# Altium PCB sensor_to_uart.PcbDoc
Units mm, origin at the board's own origin, x right, y up, seen from the top; angles counter-clockwise.
Board outline 46 x 32 mm, 2 copper layers (Top Layer, Bottom Layer); 25 components, 14 nets, 75 pads, 23 vias.
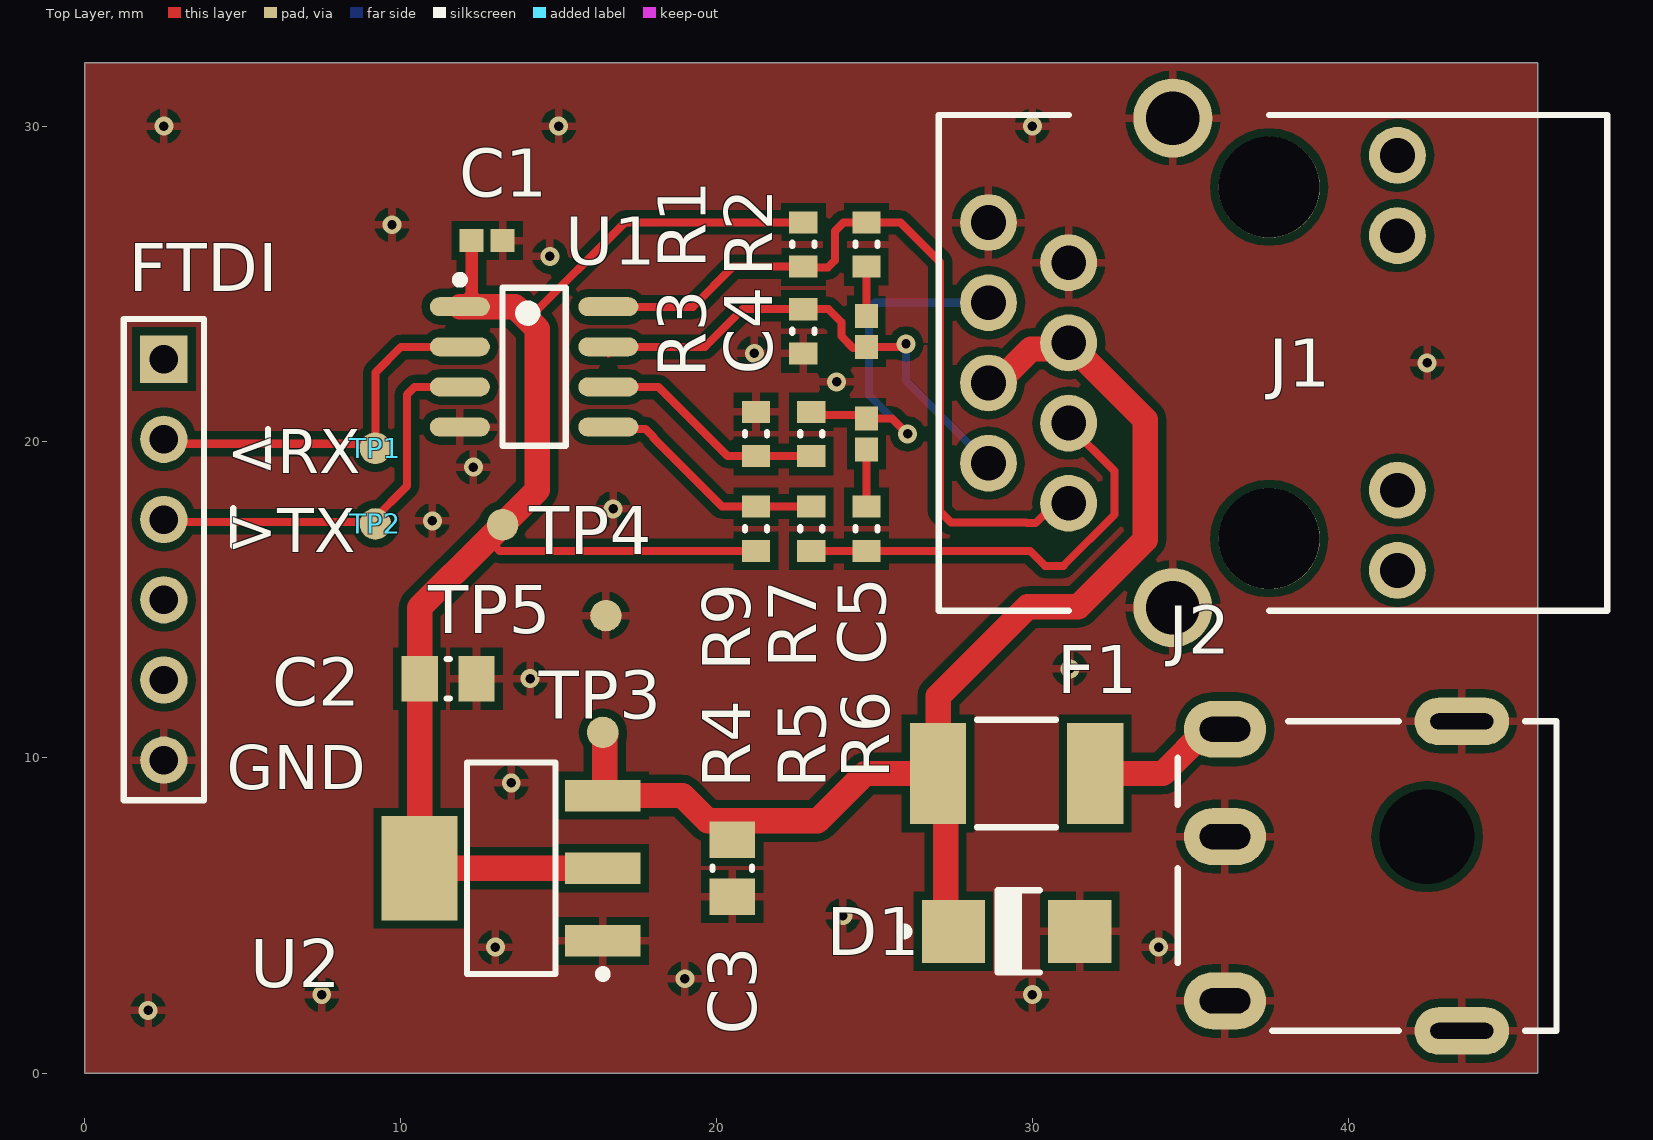
[diagram p0: Top Layer view]
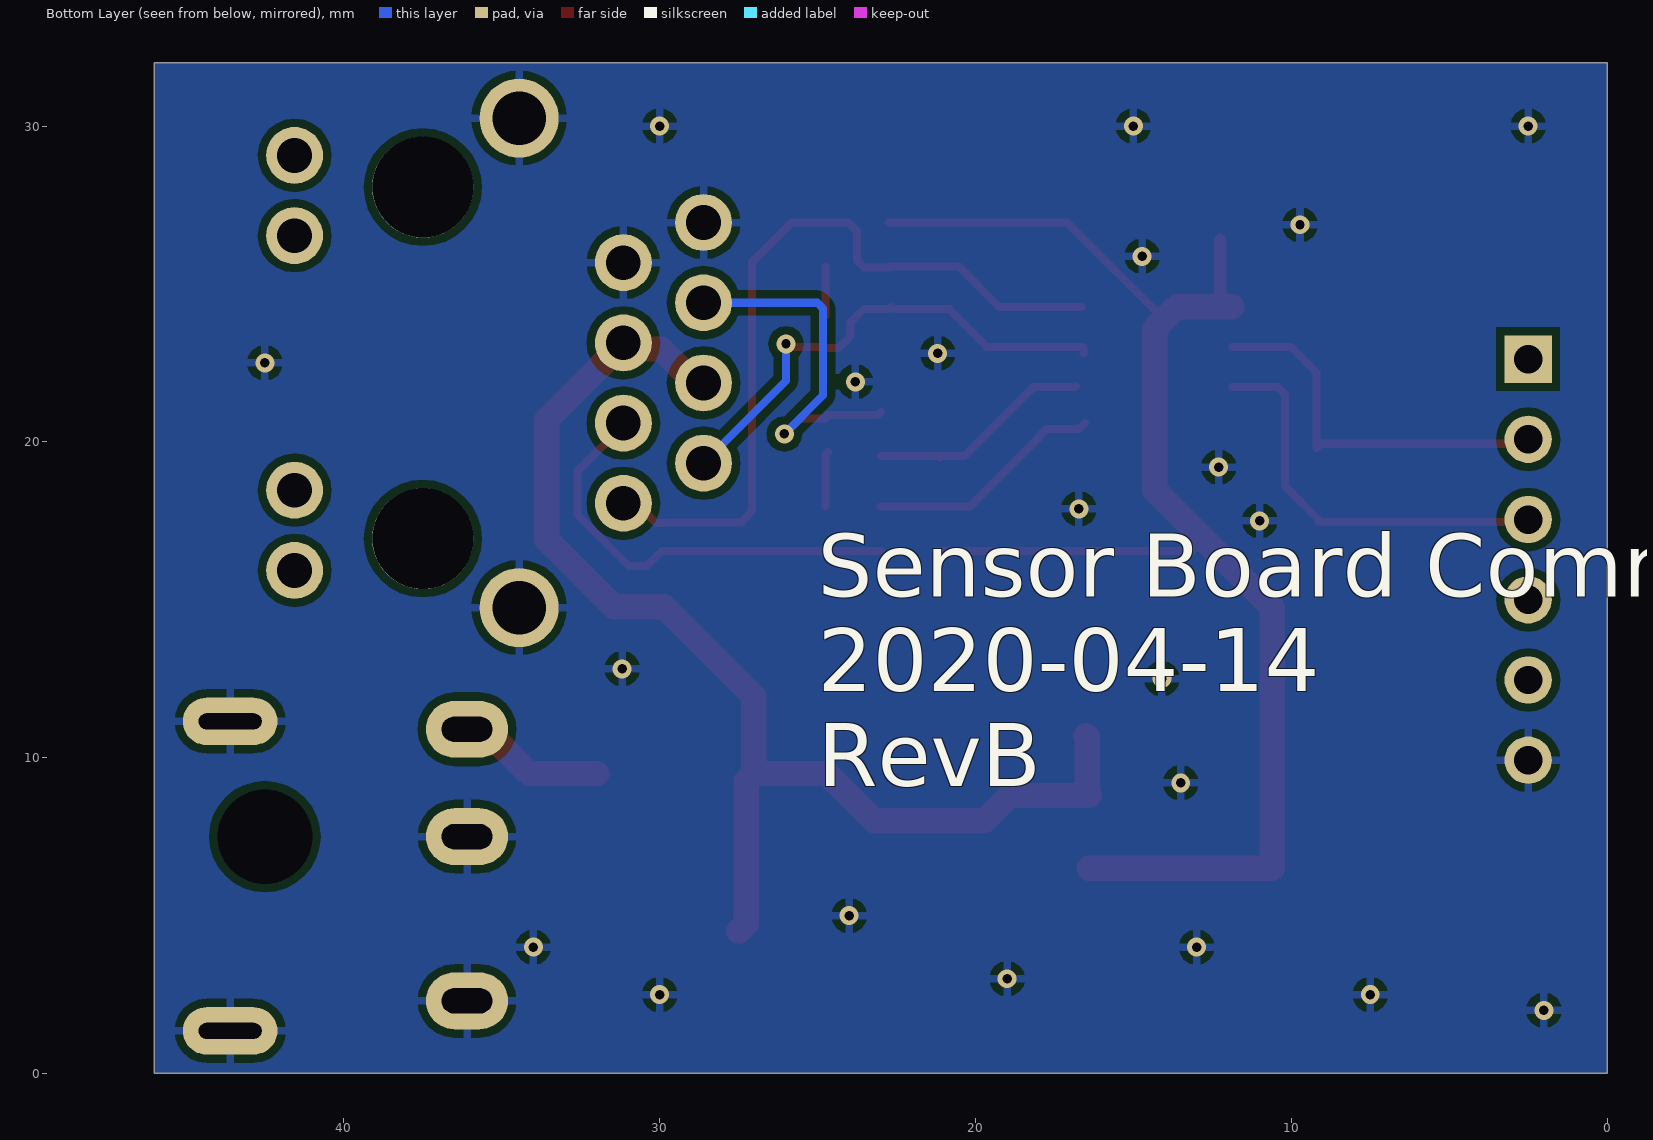
[diagram p1: Bottom Layer view, seen from below]

## Layer stack, top to bottom
Top Solder: solder mask 0.0102, Solder Resist, Dk 3.5
Top Layer: signal copper 0.0356
Dielectric 1: dielectric 0.32, FR-4, Dk 4.8
Bottom Layer: signal copper 0.0356
Bottom Solder: solder mask 0.0102, Solder Resist, Dk 3.5

## Board outline
0,0 0,32 46,32 46,0

## Design rules (kind name [scope] priority, off if disabled: settings)
Clearance [All] p1: gap=0.254 ignorepadtopadclearanceinfootprint=FALSE except(0: Arc-Hole Track-Hole SMDPad-Hole THPad-Hole Via-Hole Fill-Hole Poly-Hole Region-Hole Text-Hole)
PolygonConnect [All] p1: connectstyle=Relief reliefconductorwidth=0.254 reliefentries=4 polygonreliefangle="90 Angle" airgapwidth=0.254
RoomDefinition sensor_to_uart [InComponentClass('sensor_to_uart')] p1: confinementstyle=ConfineIn formatcopy=TRUE lockcomponents=FALSE outline 0,-2.5 50,-2.5 50,33.003 0,33.003
RoutingVias [All] p1: holewidth=0.711 width=1.27 viastyle="Through Hole" minholewidth=0.711 minwidth=1.27 maxholewidth=0.711 maxwidth=1.27
SolderMaskExpansion [All] p1: expansion=0.102 istentingtop=FALSE
Width [All] p1: maxlimit=0.8 minlimit=0.254 preferedwidth=0.254
30 further rules are at their usual default settings.

## Components (designator, comment, footprint, x,y, rotation, side; value= is the part's Value field where it differs from the comment)
C1 "GRM155R71C104KA88D" CAPC1005X55X25ML05T10 12.735,26.375 r180 top
C2 "CAP 10uF 10V 0805(2012)" CAPC0805(2012)145_N 11.5,12.5 r180 top value=10uF
C3 "CAP 10uF 10V 0805(2012)" CAPC0805(2012)145_N 20.5,6.5 r90 top value=10uF
C4 "TBD" CAPC1005X55X25ML05T10 24.75,23.5 r90 top
C5 "TBD" CAPC1005X55X25ML05T10 24.75,20.25 r270 top
D1 "MURA110T3G" ONSC-SMA-2-403D-02_V 29.5,4.5 r0 top
F1 "mSMD110-33V" SEAANDLAND_1812 29.5,9.5 r180 top
FTDI "Header 6" HDR1X6 2.5,22.62 r270 top
J1 "RJ45_59_8P8C_LED" RJ45_59_8P8C_LED 37.5,22.5 r90 top
J2 "DC-044A-2.5A-2.0" DC-044A-2.5A-2.0 46.6,7.5 r270 top
R1 "10k" RESC0603(1608)_L 22.75,26.25 r270 top value="120.00 Ohm"
R2 "100R" RESC0603(1608)_L 24.75,26.25 r270 top value="120.00 Ohm"
R3 "10k" RESC0603(1608)_L 22.75,23.5 r270 top value="120.00 Ohm"
R4 "10k" RESC0603(1608)_L 21.25,17.25 r90 top value="120.00 Ohm"
R5 "50R" RESC0603(1608)_L 23,17.25 r90 top value="120.00 Ohm"
R6 "100R" RESC0603(1608)_L 24.75,17.25 r90 top value="120.00 Ohm"
R7 "50R" RESC0603(1608)_L 23,20.25 r270 top value="120.00 Ohm"
R9 "10k" RESC0603(1608)_L 21.25,20.25 r90 top value="120.00 Ohm"
TP1 "TEST_POINT" TP-SMD-1mm 9.2,19.8 r270 top
TP2 "TEST_POINT" TP-SMD-1mm 9.2,17.4 r270 top
TP3 "TEST_POINT" TP-SMD-1mm 16.4,10.8 r270 top
TP4 "TEST_POINT" TP-SMD-1mm 13.225,17.375 r270 top
TP5 "TEST_POINT" TP-SMD-1mm 16.5,14.5 r270 top
U1 "ADM3488ARZ" ADI-R-8_L 14.225,22.375 r0 top
U2 "LD1117S33CTR" SOT-223_N 13.5,6.5 r180 top

## Footprints (in the part's own frame and the unit in brackets; to place one, negate y for a bottom-side part, rotate by r counter-clockwise, add the part's x,y. Pads: shape width x height; smd on the part's side, far side on the other; paste and mask are expansions set on the pad)
ADI-R-8_L [mm] "SOIC, 8-Leads, Body 5x4mm, Pitch 1.27mm, IPC High Density"
  oval 1.9x0.6 smd: 1(-2.35,1.905) 2(-2.35,0.635) 3(-2.35,-0.635) 4(-2.35,-1.905) 5(2.35,-1.905) 6(2.35,-0.635) 7(2.35,0.635) 8(2.35,1.905)
  silkscreen extent -2.47,-2.5 1,2.88, body extent -2,-2.5 2,2.5, height 1.75
CAPC0805(2012)145_N [mm] "Chip Capacitor, Body 2.0x1.2mm, Height 1.45mm, IPC Medium Density"
  rect 1.15x1.45 smd: 1(-0.9,0) 2(0.9,0)
  silkscreen extent -0.05,-0.62 0.05,0.63, body extent -1.1,-0.72 1.1,0.73, height 1.45
CAPC1005X55X25ML05T10 [mm] "Chip Capacitor, 2-Leads, Body 1.00x0.50mm, IPC Low Density"
  rect 0.76x0.72 smd: 1(-0.49,0) 2(0.49,0)
  body extent -0.53,-0.28 0.53,0.27, height 0.55
DC-044A-2.5A-2.0 [mm] "DC Jack, 6mm OD, 2mm ID"
  rrect100% 1.8x2.6 hole 0.8 slot 1.6 at 90 deg: 1(-3.4,-10.5) 2(5.2,-10.5) 3(0,-10.5)
  rrect100% 1.5x3 hole 0.5 slot 2 at 90 deg: 4(-3.65,-3) 5(6.15,-3)
  rrect100% 2x2 hole 3 unplated: MNT(0,-4.1)
  silkscreen extent -3.65,-12 6.15,0, body extent -3.75,-11.75 6.35,0, height 7.3
HDR1X6 [mm] "Connector; Header; 6 Position"
  rect 1.5x1.5 hole 0.9: 1(0,0)
  round 1.5 hole 0.9: 2(2.54,0) 3(5.08,0) 4(7.62,0) 5(10.16,0) 6(12.7,0)
  silkscreen extent -1.27,-1.27 13.97,1.27
ONSC-SMA-2-403D-02_V [mm] "Molded, 2-Leads, Body 4.57x2.92mm"
  rect 2x2 smd: 1(-2,0) 2(2,0)
  silkscreen extent -3.67,-1.3 0.74,1.3, body extent -2.16,-1.3 2.16,1.3, height 2.2
RESC0603(1608)_L [mm] "Chip Resistor, Body 1.6x0.8mm, IPC High Density"
  rect 0.7x0.9 smd: 1(-0.7,0) 2(0.7,0)
  silkscreen extent -0.05,-0.35 0.05,0.35, body extent -0.85,-0.47 0.85,0.47, height 0.6
RJ45_59_8P8C_LED [mm] "Generic RJ49 jack with LED and without magnetics"
  round 1.8 hole 1.1: 1(-4.445,6.35) 2(-3.175,8.89) 3(-1.905,6.35) 4(-0.635,8.89) 5(0.635,6.35) 6(1.905,8.89) 7(3.175,6.35) 8(4.445,8.89) 9(-6.57,-4.06) 10(-4.03,-4.06) 11(4.03,-4.06) 12(6.57,-4.06)
  round 3.2 hole 3.2 unplated: POS1(-5.565,0) POS2(5.565,0)
  round 2.5 hole 1.7: S1(-7.75,3.05) S2(7.75,3.05)
  silkscreen extent -7.85,-10.7 7.85,10.46, body extent -7.85,-10.58 7.85,10.58, height 13.45
SEAANDLAND_1812 [mm] "Surface Mount Fuses 1812"
  rrect0% 1.78x3.2 smd paste+0: 1(-2.49,0) 2(2.49,0)
  silkscreen extent -1.25,-1.71 1.25,1.71, body extent 0,-0.25 0.2,0, height 2
SOT-223_N [mm] "SOT223, 4-Leads, Body 6.5x3.5mm, Pitch 2.3mm, Lead Span 7mm, IPC Medium Density"
  rect 2.4x1 smd: 1(-2.9,2.3) 2(-2.9,0) 3(-2.9,-2.3)
  rect 2.4x3.3 smd: 4(2.9,0)
  silkscreen extent -3.03,-3.35 1.4,3.47, body extent -1.85,-3.35 1.85,3.35, height 1.8
TP-SMD-1mm [mm] "Test point, round, 1mm, SMD"
  round 1 smd paste-999: 1(0,0)

## Part data
C1 C4 C5: library part CMP-2100-03641-1, "Chip Capacitor, 0.1 uF, +/- 10%, 16 V, -55 to 125 degC, 0402 (1005 Metric), RoHS, Tape and Reel", Capacitance=100nF, Case Code (Imperial)=0402, Case Code (Metric)=1005, Dielectric=X7R, Dielectric Material=Ceramic, Insulation Resistance=10GR, Manufacturer=Murata, Max Operating Temperature=125degC, Min Operating Temperature=-55degC, Package Description="2-Pin Surface Mount Device, Body 1 x 0.5 mm", Package Quantity=1, Tolerance=10%, Voltage=16V, Case/Package=0402, Datasheet URL=http://psearch.en.murata.com/capacitor/product/GRM155R71C104KA88%23.pdf, Datasheet Version=42675.0, Depth=0.5mm, Height=0.5mm, Lead Free=LeadFree, Length=1mm, Manufacturer URL=http://www.murata.com/, Material=Ceramic, Mount=SurfaceMount, Number of Pins=2, Package Reference=0402, Packaging=TapeandReel, Radiation Hardening=No, REACH SVHC=NoSVHC, RoHSCompliant=true, Termination=SMD/SMT, Thickness=0.022inch, Voltage Rating=16V, Voltage Rating (DC)=16V, Width=0.5mm
C2 C3: library part CMP-1036-04922-1, "CAP 10uF 10V ±10% 0805 (2012 Metric) Thickness 1.45mm SMD", Case-EIA=0805, Case-Metric=2012, Rated Voltage="10 V", Tolerance=Â±10%, Max Thickness="1.45 mm", Technology=SMT
D1: library part CMP-0902-00293-1, "Surface Mount Ultrafast Power Rectifier, 2-Pin SMA, Pb-Free, Tape and Reel", Manufacturer="On Semiconductor", ComponentLink1Description="Manufacturer URL", ComponentLink1URL=http://www.onsemi.com/, ComponentLink2Description=Datasheet, ComponentLink2URL=http://www.onsemi.cn/pub_link/Collateral/MURA105T3-D.PDF, ComponentLink3Description="Package Specification", ComponentLink3URL=http://www.onsemi.com/pub_link/Collateral/403D-02.PDF, DatasheetVersion="Rev. 5", IFSM Max (A)=50, Mounting Technology="Surface Mount", PackageDescription="2-Pin Small Molded Package, J-Bend Lead, Body 2.605 x 4.315 mm", PackageReference=SMA-2-403D-02, PackageVersion="Rev. G, 07/2012", Packing="Tape and Reel", PartNumber=MURA110T3G, RoHS=TRUE, Type=Ultrafast
F1: "Surface Mount Fuses 33V 100A 1.1A 2.2A 1812 RoHS", Manufacturer="Sea & Land Electronic Corp", ComponentLink2Description=Datasheet, ComponentLink2URL="nSMD020-30V 0-2A-30V-Self-healing-fuse_C69680.pdf", PartNumber=mSMD110-33V
FTDI: "Header, 6-Pin", LatestRevisionDate=17-Jul-2002, LatestRevisionNote="Re-released for DXP Platform.", Publisher="Altium Limited"
J1: "Generic RJ49 jack with LED and without magnetics", Manufacturer=Unknown/Generic, PartNumber=RJ45_59_8P8C_LED
J2: "DC Jack, 6mm OD, 2mm ID", Manufacturer=XKB, PartNumber=DC-044A-2.5A-2.0
R1 R2 R3 R4 R5 R6 R7 R9: library part CMP-1012-00052-1, "120R 0.1W 5% 0603 (1608 Metric)  SMD", Case-EIA=0603, Case-Metric=1608, Power="0.1 W", Tolerance="5 %", Technology=SMT
TP1 TP2 TP3 TP4 TP5: "Test point"
U1: library part CMP-0535-00058-1, "3.3 V Slew Rate Limited, Full-Duplex, RS-485/RS-422 Transceivers, 3 to 3.6 V, -40 to 85 degC, 8-Pin SOIC (R-8), RoHS, Tube", Manufacturer="Analog Devices", Supply Voltage="3 to 3.6 V", Temperature Range="-40 to 85 degC", ComponentLink1Description="Manufacturer URL", ComponentLink1URL=http://www.analog.com/en/index.html, ComponentLink2Description=Datasheet, ComponentLink2URL=http://www.analog.com/static/imported-files/data_sheets/ADM3483_3485_3488_3490_3491.pdf, ComponentLink3Description="Package Specification", ComponentLink3URL=http://www.analog.com/media/en/package-pcb-resources/package/pkg_pdf/soic_narrow-r/r_8.pdf, DatasheetVersion="Rev. E", Duplex=Full, Guaranteed Data Rate="0.25 Mbps", Mounting Technology="Surface Mount", Number of Drivers=1, PackageDescription="8-Pin Standard Small Outline Package, Body 4.9 x 3.9 mm, Pitch 1.27 mm", PackageVersion=06/2006, Packing=Tube, PartNumber=ADM3488ARZ, Receiver Hysteresis="50 mV", RoHS=TRUE
U2: library part CMP-0244-00307-1, "Fixed Low Drop Positive Voltage Regulator, 3.3V, 4-Pin SOT-223, Tape and Reel", ComponentLink1Description="Manufacturer URL", ComponentLink1URL=http://www.st.com, ComponentLink2Description=Datasheet, ComponentLink2URL=http://www.st.com/internet/com/TECHNICAL_RESOURCES/TECHNICAL_LITERATURE/DATASHEET/CD00000544.pdf, DatasheetVersion=1/11/2011, PackageDescription="4-Pin SOT-223 Package, 6.5 x 3.5 mm Body, 2.3 mm Pitch, 7 mm Lead Span", PackageReference=SOT-223, PackageVersion=2010

## Via types
v1: diameter 0.6, hole 0.3, Top Layer to Bottom Layer, 23 vias

## Nets (pads, with @x,y where several pads share a name; then routed paths per layer and width w, separated by ;. In a path a pad name is that pad's centre, name@x,y a point inside that pad or via, vN(x,y) a via of type N, cw(c..) or ccw(c..) an arc to the next point about the centre after c; other vN are vias at no path point)
+3.3V: C1.2 C2.2 R1.1 R4.1 TP4.1 U1.1 U2.2 U2.4 | length 47.9
  Top Layer w0.254: 12.763,16.913 13.125,16.55 R4.1 ; 14.025,23.875 17.099,26.95 R1.1
  Top Layer w0.4: U1.1@12.245,24.38 C1.2
  Top Layer w0.8: U1.1 U1.1@12.145,24.28 ; U1.1@12.245,24.38 U1.1@12.145,24.28 ; U2.2 U2.4 C2.2 10.6,14.75 12.763,16.913 TP4.1 14.325,18.475 14.325,23.575 14.025,23.875 13.62,24.28 U1.1@12.145,24.28
+12V: C3.2 D1.1 F1.2 J1.4 J1.5 TP3.1 U2.3 | length 40.1
  Top Layer w0.8: TP3.1@16.5,10.7 16.462,10.662 16.462,8.862 U2.3 18.925,8.8 19.725,8 23.199,8 24.699,9.5 F1.2 ; D1.1 27.255,4.745 27.255,9.255 F1.2 ; J1.4 28.881,21.865 29.959,22.944 30.959,22.944 J1.5 33.575,20.71 33.575,16.9 31.45,14.775 29.85,14.775 27.025,11.95 27.025,9.515 F1.2
+12V_IN: F1.1 J2.1 | length 4.7
  Top Layer w0.8: F1.1 34.13,9.5 35.53,10.9 J2.1
GND: C1.1 C2.1 C3.1 D1.2 FTDI.6 J1.7 J1.8 J1.S1 J1.S2 J2.2 J2.3 J2.4 J2.5 R3.2 R9.2 TP5.1 U1.4 U2.1
  other v1: 2,2 7.5,2.5 30,2.5 19,3 13,4 34,4 24,5 13.5,9.2 14.1,12.5 31.187,12.813 11,17.5 16.725,17.875 12.3,19.2 23.8,21.9 42.5,22.5 21.2,22.8 14.725,25.875 9.725,26.875 2.5,30 15,30 30,30
NetC4_2: C4.2 R2.2 | length 1.6
  Top Layer w0.254: C4.2 R2.2
NetC5_2: C5.2 R6.2 | length 1.8
  Top Layer w0.254: C5.2@24.675,19.675 24.75,19.6 R6.2
NetR4_2: R4.2 R5.2 U1.5 | length 7.6
  Top Layer w0.254: U1.5@16.525,20.6 16.721,20.404 17.747,20.404 18,20.151 18,20.125 20.175,17.95 R4.2 R5.2
NetR7_2: R7.2 R9.1 U1.6 | length 7.2
  Top Layer w0.254: U1.6@16.825,21.775 16.86,21.74 18.16,21.74 20.35,19.55 R9.1 ; R9.1@21.125,19.5 21.175,19.55 R7.2
SENSOR_RX+: J1.3 R5.1 R6.1 | length 14.1
  Top Layer w0.254: R5.1 24.7,16.55 R6.1@24.75,16.5 ; R6.1@24.8,16.45 R6.1@24.75,16.5 ; J1.3 31.15,20.525 32.6,19.075 32.6,17.693 30.982,16.075 30.4,16.075 29.925,16.55 24.8,16.55 R6.1@24.75,16.5
SENSOR_RX-: C5.1 J1.6 R7.1 | length 11.7
  Top Layer w0.254: R7.1 23.105,20.845 24.68,20.845 C5.1@24.785,20.74 ; C5.1 C5.1@24.785,20.74 ; v1(26.05,20.25) 25.56,20.74 C5.1@24.785,20.74
  Bottom Layer w0.254: v1(26.05,20.25) 24.825,21.475 24.825,24.226 25.004,24.405 J1.6
SENSOR_TX+: J1.1 R1.2 R2.1 U1.8 | length 25
  Top Layer w0.254: U1.8@16.65,24.275 19.25,24.275 20.525,25.55 22.575,25.55 R1.2 ; R1.2@22.75,25.525 23.525,25.525 23.75,25.75 23.75,26.675 24.025,26.95 R2.1 25.825,26.95 27.075,25.7 27.075,17.8 27.425,17.45 29.8,17.45 29.825,17.425 30.102,17.425 30.732,18.055 J1.1
SENSOR_TX-: C4.1 J1.2 R3.1 U1.7 | length 15.8
  Top Layer w0.254: U1.7@16.575,22.791 U1.7 19.635,23.01 20.825,24.2 22.6,24.2 R3.1@22.675,24.275 ; R3.1 23.55,24.2 23.95,23.8 23.95,23.35 24.325,22.975 24.715,22.975 C4.1 25.91,23.01 v1(26,23.1)
  Bottom Layer w0.254: v1(26,23.1) 26,21.935 J1.2
USART1_RX: FTDI.2 TP1.1 U1.2 | length 12.2
  Top Layer w0.254: FTDI.2 2.64,19.94 9.06,19.94 TP1.1 9.2,22.2 10.01,23.01 U1.2
USART1_TX: FTDI.3 TP2.1 U1.3 | length 12.9
  Top Layer w0.254: FTDI.3 2.57,17.47 9.13,17.47 9.13,17.532 10.2,18.602 10.2,21.5 10.44,21.74 U1.3
pads on no net: FTDI.1 FTDI.4 FTDI.5 J1.9 J1.10 J1.11 J1.12 J1.POS1 J1.POS2 J2.MNT

## Polygon pours and split planes (outlines as drawn)
GND on Top Layer "GND_L01_P001" (solid, pour order 1): 0,0 46,0 46,32 0,32
GND on Bottom Layer "GND_L02_P000" (solid, pour order 0): 0,0 46,0 46,32 0,32

## Silkscreen, mask and mechanical layers (free items; w line width, h text height)
Top Overlay:
  lines w0.2: 4.7,16.7 4.7,17.9 ; 5.8,19.2 5.8,20.4
  text "<RX" at 4.5,19 h1.4
  text ">TX" at 4.5,16.5 h1.4
  text "GND" at 4.5,9 h1.4
Bottom Overlay:
  text "Sensor Board Comms / 2020-04-14 / RevB" at 25,9.1 h2
Mechanical 1:
  the board outline again, w0.1

## Dimensions
0,0 to 0,32 on Dimensions
0,0 to 46,0 on Dimensions